# Altium PCB MainBoard_Layout_V1.PcbDoc (part 2 of 2)
Units mm, origin at the board's own origin, x right, y up, seen from the top; angles counter-clockwise.
Board outline 110.87 x 110.11 mm, 4 copper layers (Top Layer, Signal Layer 1, Signal Layer 2, Bottom Layer), stack 0.971 mm thick; 104 components, 160 nets, 547 pads, 193 vias.
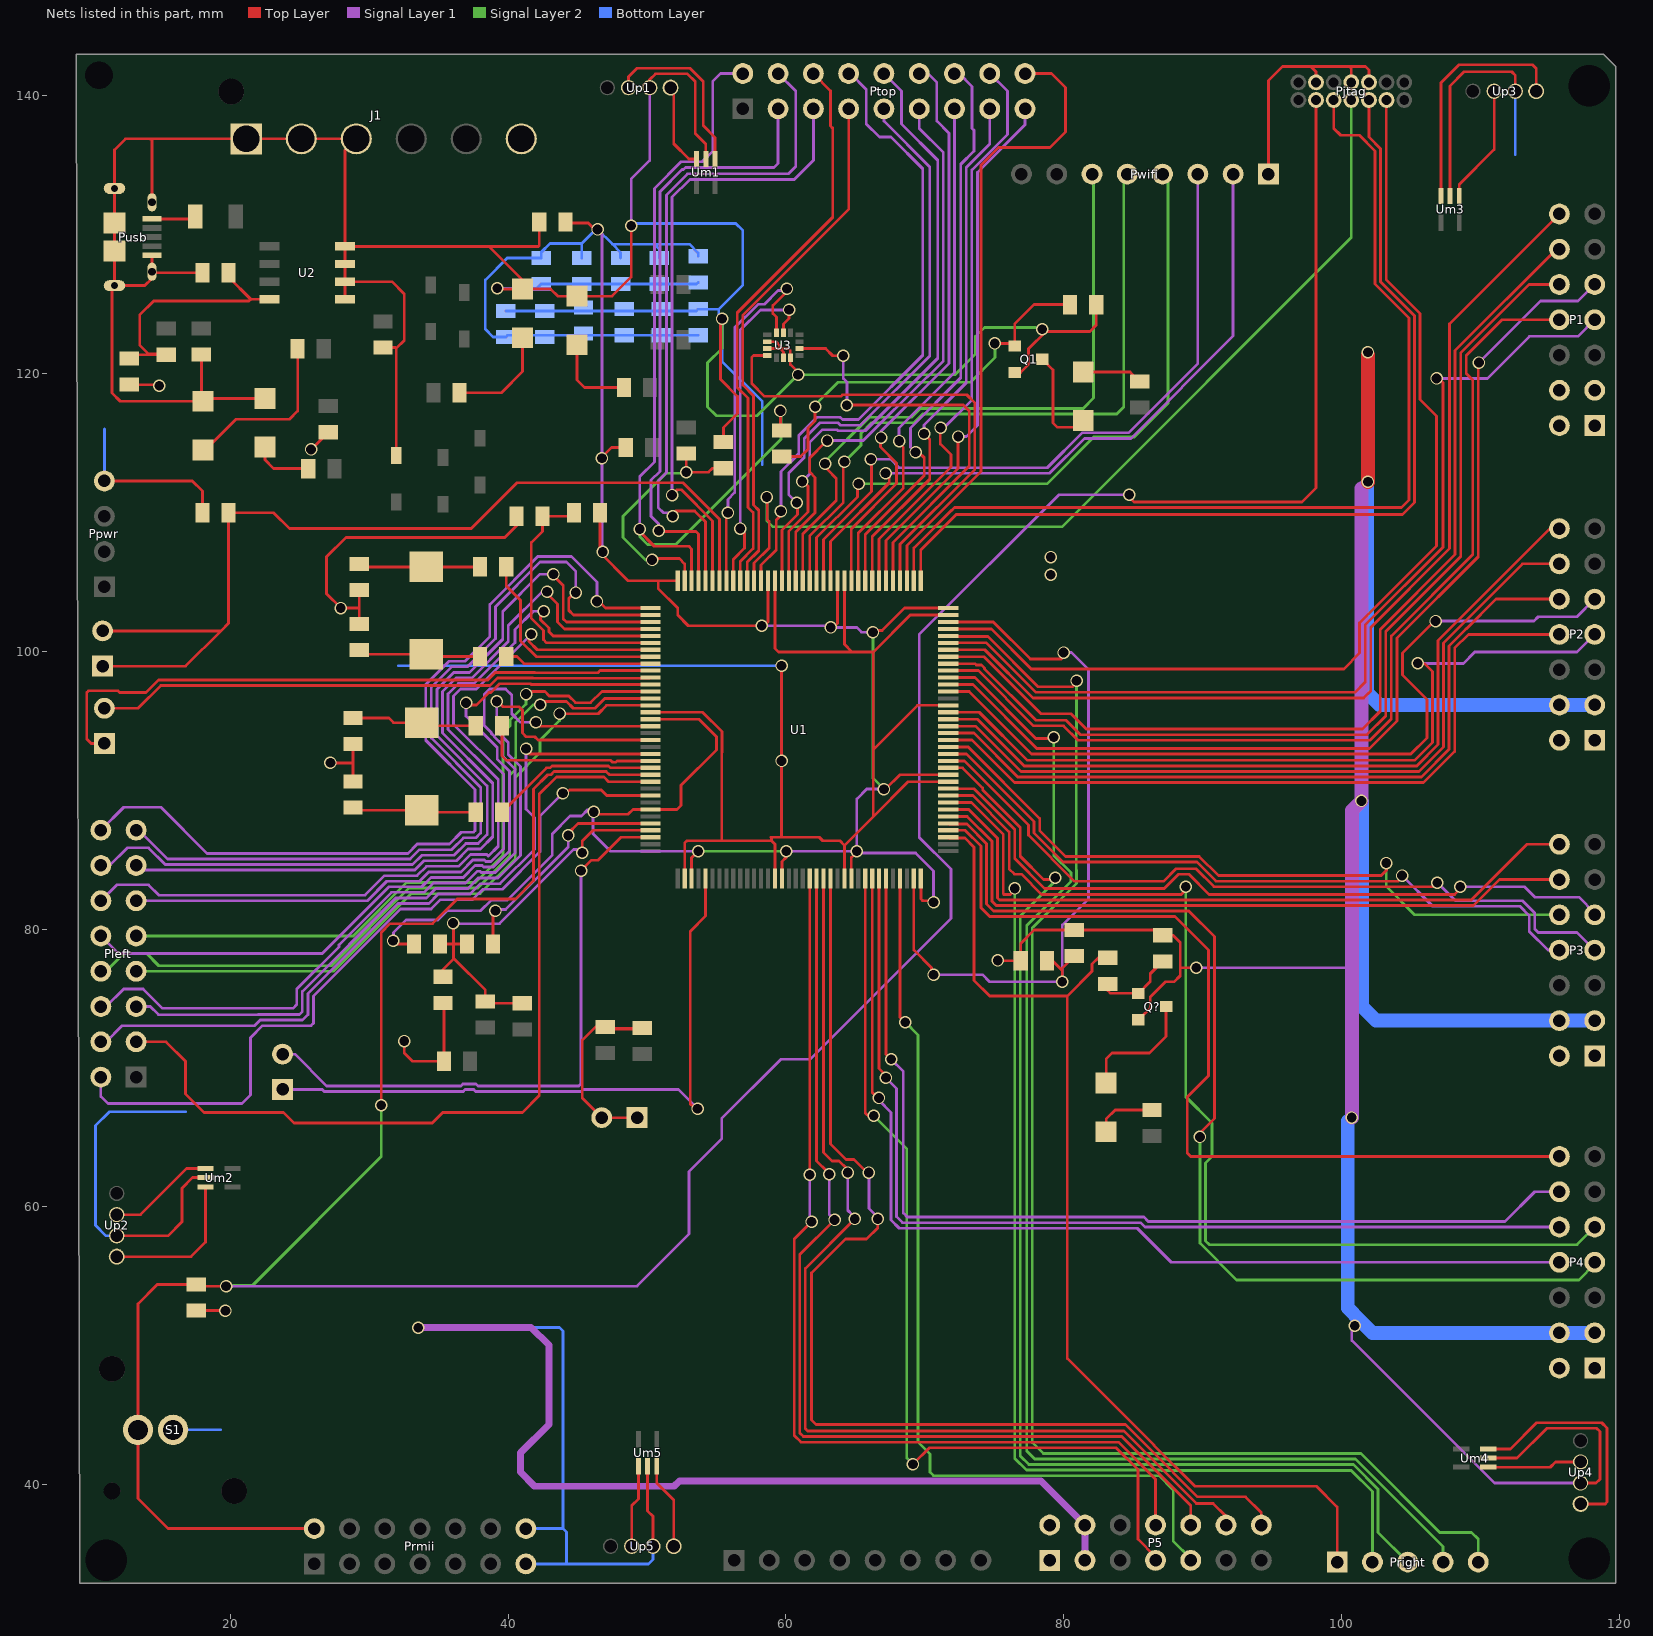
[diagram p4: the nets of this part, all layers, seen from the top]

## Via types
v1: diameter 0.9, hole 0.7, Top Layer to Bottom Layer, 193 vias

## Nets (pads, with @x,y where several pads share a name; then routed paths per layer and width w, separated by ;. In a path a pad name is that pad's centre, name@x,y a point inside that pad or via, vN(x,y) a via of type N, cw(c..) or ccw(c..) an arc to the next point about the centre after c; other vN are vias at no path point) (continued)
GND: 3V3BRD.2 3V3CHRG.2 5VCHRG.2 5VPWR.2 C1.2 C2.2 C3.2 C4.2 C6.1 C7.1 C8.1 C9.1 C10.1 C11.1 C12.1 C13.1 C14.1 C15.1 C16.1 C17.1 C18.1 C19.1 C20.1 C21.1 C26.1 C27.1 C28.2 C29.1 C30.1 D1.A J1.1 J1.2 J1.3 P1.2 P1.9 P2.2 P2.9 P3.2 P3.9 P4.2 P4.9 P5.2 P5.9 pad.1@10.541,141.478 Pjtag.5 Pjtag.7 Pjtag.11 Ppwr.4 Prmii.13 Prmii.14 Pusb.5 Pusb.S1 Pusb.S2 Pusb.S3 Pusb.S4 Pusb.S5 Pusb.S6 Pwifi.1 Q1.2 Q?.2 R11.2 R12.2 R19.1 R20.1 R24.2 R27.2 S1.1 U1.VSS U2.GND U3.2 U3.3 U3.6 U3.7 Um1.2 Um2.2 Um3.2 Um4.2 Um5.2 Up1.GND Up2.GND Up3.GND Up4.GND Up5.GND | length 841.3
  Top Layer w0.2: Ppwr.4@10.922,112.268 17.247,112.268 17.983,111.531 R19.1@17.983,109.982 ; Up2.GND@11.811,57.912 15.494,57.912 16.51,58.928 16.51,61.341 17.272,62.103 Um2.2@18.212,62.103 ; R12.2@12.7,119.202 v1@14.656,119.202 ; Pusb.5@14.351,128.534 Pusb.S2@14.351,127.334 ; Pusb.S1@14.351,132.334 14.351,136.779 14.224,136.906 ; C30.1@17.526,52.527 v1@19.507,52.527 ; C27.1@17.907,121.361 17.907,118.133 17.983,118.209 3V3CHRG.2@22.479,118.209 ; C26.1@17.983,127.254 14.431,127.254 Pusb.S2@14.351,127.334 ; 5VCHRG.2@18.034,118.006 12.067,118.006 11.475,118.597 11.475,126.158 Pusb.S6@11.651,126.334 ; v1@26.035,114.681 26.035,114.757 C29.1@27.051,115.773 ; v1@27.197,91.967 v1(27.202,91.967) 28.829,91.967 ; v1(27.952,103.116) 26.924,104.144 26.924,106.807 28.321,108.204 39.751,108.204 40.589,109.042 C21.1@40.589,109.728 ; v1@28.067,103.124 29.268,103.124 ; U2.GND@28.252,125.349 U2.GND@28.252,126.619 ; C1.2@28.829,90.621 28.829,91.967 ; C2.2@28.829,93.313 28.829,91.967 ; C4.2@29.268,101.967 29.268,103.124 ; C3.2@29.268,104.405 29.268,103.124 ; C28.2@30.988,121.869 31.862,121.869 31.935,121.796 ; D1.A@31.935,114.097 31.935,121.796 ; v1@32.512,71.755 32.512,71.069 33.096,70.485 R11.2@35.382,70.485 35.382,74.61 C7.1@35.306,74.686 ; v1@39.243,126.111 39.271,126.083 3V3BRD.2@41.029,126.083 ; C6.1@42.24,130.914 42.24,129.235 42.164,129.159 38.608,129.159 ; v1(48.857,130.654) 48.857,126.962 47.47,125.575 5VPWR.2@44.958,125.575 43.569,125.575 43.061,126.083 3V3BRD.2@41.029,126.083 ; Um5.2@50.038,41.326 50.038,38.1 50.419,37.719 Up5.GND@50.419,35.56 ; U1.VSS@50.235,95.611 53.995,95.611 55.391,94.215 55.391,92.734 55.372,92.715 55.372,86.36 ; Up1.GND@50.419,140.589 50.165,140.843 50.165,141.156 50.595,141.586 52.902,141.586 53.467,141.021 53.467,137.287 54.229,136.525 Um1.2@54.229,135.458 ; U1.VSS@52.71,83.636 52.71,86.207 52.863,86.36 55.372,86.36 ; v1@55.285,123.749 55.285,119.594 56.515,118.364 56.515,117.12 55.499,116.104 R20.1@55.499,115.062 ; U3.3@58.657,121.797 59.579,121.797 ; U3.2@58.657,122.297 59.263,122.297 59.579,121.981 59.579,121.797 ; U1.VSS@59.21,83.636 59.21,86.111 58.961,86.36 ; U1.VSS@59.21,105.086 59.21,100.194 59.455,99.949 64.77,99.949 ; v1@59.69,99.06 59.69,86.614 ; U3.6@59.817,121.137 59.817,121.559 59.579,121.797 ; v1@60.964,120.015 60.317,120.662 U3.7@60.317,121.137 60.317,121.666 60.186,121.797 59.579,121.797 ; U1.VSS@64.21,83.636 64.21,86.031 ; U1.VSS@64.21,105.086 64.21,100.509 64.77,99.949 ; U1.VSS@71.685,90.611 68.79,90.611 66.294,88.115 ; U1.VSS@71.685,96.111 69.476,96.111 66.294,92.929 ; U1.VSS@71.685,102.611 68.956,102.611 66.294,99.949 ; v1@75.241,77.724 C9.1@76.911,77.724 76.911,78.971 77.874,79.934 C8.1@80.772,79.934 86.741,79.934 R24.2@87.122,79.553 87.884,79.553 88.392,79.045 88.392,77.216 ; Q1.2@76.47,120.081 76.901,120.081 77.47,120.65 77.47,121.785 78.723,123.038 81.89,123.038 82.347,123.495 R27.2@82.347,124.968 ; Q?.2@85.376,73.472 86.233,74.329 86.233,75.118 87.315,76.2 87.95,76.2 88.392,76.642 88.392,77.216 ; v1@89.46,77.216 88.392,77.216 ; Pwifi.1@94.742,134.366 94.742,141.097 95.758,142.113 97.79,142.113 ; Pjtag.11@98.171,140.97 98.171,141.732 97.79,142.113 ; Pjtag.7@100.711,140.97 100.711,141.986 100.584,142.113 ; Pjtag.5@101.981,140.97 101.981,141.859 101.727,142.113 100.584,142.113 ; Um3.2@107.823,132.791 107.823,140.716 108.839,141.732 112.268,141.732 112.522,141.478 Up3.GND@112.522,140.335 ; Um4.2@110.566,41.91 112.649,41.91 114.789,44.05 118.383,44.05 118.618,43.815 118.618,40.386 118.34,40.108 Up4.GND@117.221,40.108 ; Pusb.S6@11.651,126.334 Pusb.S5@11.651,128.834 Pusb.S4@11.651,130.834 Pusb.S3@11.651,133.334 11.651,136.111 12.446,136.906 14.224,136.906 ; Pusb.S6@11.651,126.334 13.83,126.334 14.351,126.855 Pusb.S2@14.351,127.334 ; 14.224,136.906 J1.1@21.14,136.906 J1.2@25.1,136.906 J1.3@29.06,136.906 28.252,136.098 U2.GND@28.252,129.159 ; U2.GND@28.252,126.619 31.626,126.619 32.512,125.733 32.512,122.373 31.935,121.796 ; U2.GND@28.252,126.619 U2.GND@28.252,127.889 U2.GND@28.252,129.159 ; U2.GND@28.252,129.159 38.608,129.159 ; 38.608,129.159 41.029,126.738 3V3BRD.2@41.029,126.083 ; 55.372,86.36 58.961,86.36 ; 58.961,86.36 58.961,86.581 58.928,86.614 59.69,86.614 ; 59.69,86.614 62.397,86.614 62.651,86.36 63.881,86.36 64.21,86.031 ; 64.21,86.031 66.294,88.115 ; 64.77,99.949 66.294,99.949 ; 66.294,88.115 66.294,92.929 ; 66.294,92.929 66.294,99.949 ; 97.79,142.113 100.584,142.113
  Top Layer w1: v1(101.913,112.206) v1@101.913,121.353
  Signal Layer 1 w0.2: v1(48.857,130.654) 48.857,134.015 50.189,135.347 Up1.GND@50.189,140.589 ; v1(89.555,77.21) 100.745,77.21 100.751,77.216 ; v1@100.751,51.435 100.751,50.379 111.022,40.108 Up4.GND@117.221,40.108
  Signal Layer 1 w0.5: v1@33.782,51.308 41.656,51.308 42.926,50.038 42.926,44.323 40.894,42.291 40.894,40.894 41.91,39.878 51.943,39.878 52.324,40.259 78.359,40.259 P5.9@81.534,37.084 P5.2@81.534,34.544
  Signal Layer 1 w0.6: 101.442,111.735 v1(101.913,112.206)
  Signal Layer 1 w1: v1(100.751,66.431) 100.751,77.216 100.751,88.532 v1(101.442,89.223) 101.442,111.735
  Signal Layer 2 w0.2: v1(55.397,123.944) 55.397,121.818 54.356,120.777 54.356,117.602 54.991,116.967 57.927,116.967 v1(60.873,119.914) 72.162,119.914 73.66,121.412 73.66,122.682 74.295,123.317 v1@78.359,123.317
  Bottom Layer w0.2: Ppwr.4@10.922,112.268 10.922,116.006 ; Up2.GND@11.811,57.912 11.049,57.912 10.287,58.674 10.287,65.853 11.28,66.846 16.755,66.846 ; S1.1@15.875,43.942 19.304,43.942 ; 32.102,98.962 v1(59.683,98.962) ; v1@33.299,51.308 43.688,51.308 43.942,51.054 43.942,36.83 ; v1(39.216,126.146) 42.082,126.146 C14.1@42.377,126.441 C13.1@45.298,126.441 C12.1@48.092,126.441 C11.1@50.886,126.441 53.553,126.441 C10.1@53.68,126.568 ; C15.1@39.837,124.511 C16.1@42.631,124.511 53.553,124.511 C20.1@53.68,124.638 55.169,124.638 ; Prmii.13@41.275,34.29 44.196,34.29 ; Prmii.14@41.275,37.211 Prmii.14@41.275,36.83 43.942,36.83 ; v1@49.022,130.81 56.388,130.81 56.896,130.302 56.896,126.365 55.169,124.638 ; Up5.GND@50.419,35.56 50.419,34.603 50.106,34.29 44.196,34.29 ; 58.3,113.451 58.3,117.976 55.397,120.879 v1(55.397,123.944) 55.169,124.172 55.169,124.638 ; v1@100.457,66.167 v1@100.711,66.421 ; v1(100.965,51.435) 101.346,51.816 ; 112.522,135.763 Up3.GND@112.522,140.335 ; 43.942,36.83 44.196,36.576 44.196,34.29
  Bottom Layer w1: v1@100.457,66.167 100.457,52.705 101.346,51.816 102.235,50.927 P4.9@115.697,50.927 P4.2@118.237,50.927 ; v1@101.473,89.154 101.473,74.422 102.489,73.406 P3.9@115.697,73.406 P3.2@118.237,73.406 ; v1@101.854,112.06 101.854,97.028 102.743,96.139 P2.9@115.697,96.139 P2.2@118.237,96.139
  other v1: 33.52,51.289 19.64,52.508 32.526,71.936 75.259,77.739 59.683,92.104 79.068,105.518 79.068,106.788 25.806,114.534 14.884,119.127 101.913,121.528 78.466,123.19
I2C1_SCL: U1.PB6 U3.13 | length 24.5
  Top Layer w0.2: U1.PB6@56.21,105.086 56.21,106.616 57.023,107.429 57.023,108.526 v1(56.71,108.839) ; U3.13@59.817,122.957 59.817,123.571 60.223,123.977 v1(60.223,124.587)
  Signal Layer 1 w0.2: v1(56.71,108.839) 56.71,123.131 58.166,124.587 60.071,124.587 v1@60.198,124.714
I2C1_SDA: U1.PB7 U3.14 | length 26.8
  Top Layer w0.2: U1.PB7@55.71,105.086 55.71,109.731 v1@55.854,109.875 ; U3.14@59.317,122.957 59.317,124.071 59.055,124.333 59.055,124.905 60.071,125.921 v1(60.071,126.111)
  Signal Layer 1 w0.2: v1(55.821,109.982) 55.821,110.939 56.31,111.428 56.31,123.297 58,124.987 58.439,124.987 59.436,125.984 v1@59.918,125.984
I2C2_SCL: Pi2c.2 U1.PF1 | length 40.2
  Top Layer w0.2: Pi2c.2@10.922,95.905 13.355,95.905 14.986,97.536 38.696,97.536 39.23,98.07 41.764,98.07 41.773,98.061 50.185,98.061 U1.PF1@50.235,98.111
I2C2_SDA: Pi2c.1 U1.PF0 | length 46.1
  Top Layer w0.2: Pi2c.1@10.922,93.365 9.981,93.365 9.652,93.694 9.652,97.028 9.779,97.155 11.905,97.155 12.032,97.028 13.912,97.028 14.82,97.936 38.531,97.936 39.065,98.47 41.929,98.47 41.938,98.461 46.467,98.461 46.617,98.611 U1.PF0@50.235,98.611
JTCK-SWCLK: Pjtag.6 U1.PA14 | length 69.5
  Top Layer w0.2: U1.PA14@69.71,105.086 69.71,107.302 72.263,109.855 104.394,109.855 105.264,110.725 105.264,124.167 102.82,126.611 102.82,136.194 101.981,137.033 Pjtag.6@101.981,139.7
JTDI: Pjtag.10 U1.PA15 | length 71.3
  Top Layer w0.2: U1.PA15@69.21,105.086 69.21,107.437 71.94,110.167 71.951,110.167 72.136,110.351 104.325,110.351 104.864,110.891 104.864,124.002 102.42,126.445 102.42,136.028 101.288,137.16 99.949,137.16 99.441,137.668 Pjtag.10@99.441,139.7
JTDO_SWO: Pjtag.8 U1.PB3 | length 68.9
  Top Layer w0.2: U1.PB3@57.71,105.086 57.71,106.351 58.801,107.442 58.801,109.347 58.648,109.5 v1@58.648,110.998
  Signal Layer 2 w0.2: v1(58.628,111.108) 58.628,109.393 59.055,108.966 79.883,108.966 100.711,129.794 Pjtag.8@100.711,139.7
JTMS-SWDIO: Pjtag.4 U1.PA13 | length 74.9
  Top Layer w0.2: U1.PA13@71.685,101.611 74.792,101.611 77.666,98.737 100.174,98.737 101.308,99.871 101.308,102.053 106.853,107.598 106.853,116.953 105.664,118.142 105.664,124.333 103.22,126.777 103.22,139.669 Pjtag.4@103.251,139.7
LCONN1: Pleft.16 U1.PE2 | length 65.1
  Top Layer w0.2: v1@46.609,103.505 47.003,103.111 U1.PE2@50.235,103.111
  Signal Layer 1 w0.2: Pleft.16@10.668,87.122 12.319,88.773 14.986,88.773 18.314,85.445 32.776,85.445 33.45,86.119 35.77,86.119 36.62,86.969 37.502,86.969 37.618,87.086 37.618,90.051 34.068,93.601 34.068,97.602 35.748,99.282 36.884,99.282 38.679,101.077 38.679,103.38 42.125,106.826 44.558,106.826 46.395,104.989 v1(46.395,103.594)
LCONN2: Pleft.15 U1.PE3 | length 63
  Top Layer w0.2: v1@44.685,104.14 44.361,103.816 44.361,102.959 44.709,102.611 U1.PE3@50.235,102.611
  Signal Layer 1 w0.2: Pleft.15@13.208,87.122 13.393,87.122 15.47,85.045 32.941,85.045 33.616,85.719 35.936,85.719 36.785,86.569 37.667,86.569 38.018,86.92 38.018,90.216 34.468,93.767 34.468,97.437 35.913,98.882 37.049,98.882 39.079,100.912 39.079,103.214 42.291,106.426 44.196,106.426 44.871,105.751 v1(44.871,104.229)
LCONN3: Pleft.14 U1.PE4 | length 64.4
  Top Layer w0.2: v1@43.312,105.41 43.961,104.761 43.961,102.343 44.193,102.111 U1.PE4@50.235,102.111
  Signal Layer 1 w0.2: Pleft.14@10.668,84.582 11.303,84.582 12.573,85.852 14.097,85.852 15.304,84.645 33.107,84.645 33.781,85.319 36.101,85.319 36.951,86.169 37.84,86.169 38.488,86.817 38.488,90.312 34.868,93.932 34.868,97.271 36.079,98.482 37.215,98.482 39.605,100.872 39.605,102.87 42.291,105.556 v1(43.256,105.556)
LCONN4: Pleft.13 U1.PE5 | length 59.2
  Top Layer w0.2: v1@42.818,104.14 43.561,103.397 43.561,102.108 44.058,101.611 U1.PE5@50.235,101.611
  Signal Layer 1 w0.2: Pleft.13@13.208,84.582 13.545,84.245 33.273,84.245 33.947,84.919 36.267,84.919 37.117,85.769 38.006,85.769 38.888,86.651 38.888,90.499 35.268,94.119 35.268,97.105 36.245,98.082 37.381,98.082 40.005,100.706 40.005,101.854 42.437,104.286 v1(42.799,104.286)
LCONN5: Pleft.12 U1.PE6 | length 62.4
  Top Layer w0.2: v1@42.334,102.786 42.334,102.278 42.945,101.667 42.945,101.407 43.241,101.111 U1.PE6@50.235,101.111
  Signal Layer 1 w0.2: Pleft.12@10.668,82.042 11.811,83.185 14.097,83.185 14.84,82.442 29.691,82.442 31.094,83.845 33.438,83.845 34.113,84.519 36.433,84.519 37.283,85.369 38.457,85.369 38.557,85.269 38.591,85.269 39.288,85.966 39.288,90.76 35.668,94.38 35.668,96.94 36.41,97.682 37.547,97.682 40.488,100.623 40.488,101.575 41.802,102.889 v1(42.557,102.889)
LCONN6: Pleft.11 U1.PC13 | length 57.4
  Top Layer w0.2: v1@41.501,101.111 41.501,100.705 42.095,100.111 U1.PC13@50.235,100.111
  Signal Layer 1 w0.2: Pleft.11@13.208,82.042 29.857,82.042 31.26,83.445 33.604,83.445 34.278,84.119 36.598,84.119 37.448,84.969 38.291,84.969 38.391,84.869 38.757,84.869 39.688,85.8 39.688,91.122 36.068,94.742 36.068,96.774 36.576,97.282 37.712,97.282 v1(41.668,101.238)
LCONN7: Pleft.10 U1.PF2 | length 58.9
  Top Layer w0.2: v1@37.033,96.139 37.719,96.139 38.608,97.028 38.754,97.028 39.396,97.67 41.598,97.67 41.657,97.611 U1.PF2@50.235,97.611
  Signal Layer 1 w0.2: Pleft.10@10.668,79.502 11.938,78.232 26.612,78.232 31.425,83.045 33.78,83.045 34.454,83.719 36.764,83.719 37.614,84.569 38.125,84.569 38.225,84.469 38.923,84.469 40.088,85.634 40.088,91.369 39.205,92.252 39.205,93.094 36.969,95.33 v1(36.969,96.285)
LCONN8: Pleft.9 U1.PF3 | length 50.8
  Top Layer w0.2: v1@41.275,96.901 41.529,96.901 41.739,97.111 42.641,97.111 42.959,96.793 44.362,96.793 44.851,96.304 45.94,96.304 46.747,97.111 U1.PF3@50.235,97.111
  Signal Layer 2 w0.2: Pleft.9@13.208,79.502 28.841,79.502 32.689,83.35 37.642,83.35 39.624,85.332 39.624,94.126 40.138,94.64 40.138,95.047 41.287,96.196 v1(41.287,96.92)
LCONN9: Pleft.8 U1.PF4 | length 54.3
  Top Layer w0.2: v1@42.24,96.111 42.522,96.393 44.196,96.393 44.685,95.904 46.247,95.904 46.954,96.611 U1.PF4@50.235,96.611
  Signal Layer 2 w0.2: Pleft.8@10.668,76.962 11.049,76.962 12.319,78.232 13.97,78.232 14.84,77.362 27.266,77.362 32.854,82.95 37.807,82.95 40.113,85.256 40.113,91.098 40.513,91.498 40.513,92.329 40.538,92.354 40.538,94.881 41.815,96.158 v1(42.303,96.158)
LCONN10: Pleft.7 U1.PF5 | length 49.2
  Top Layer w0.2: v1@43.688,95.504 46.482,95.504 47.089,96.111 U1.PF5@50.235,96.111
  Signal Layer 2 w0.2: Pleft.7@13.208,76.962 27.432,76.962 33.02,82.55 37.973,82.55 40.513,85.09 40.513,90.932 42.291,92.71 42.291,93.599 43.7,95.008 v1(43.7,95.523)
LCONN11: Pleft.6 U1.PF6 | length 62.5
  Top Layer w0.2: v1@42.152,94.742 42.283,94.611 U1.PF6@50.235,94.611
  Signal Layer 1 w0.2: Pleft.6@10.668,74.422 11.049,74.422 12.319,75.692 13.716,75.692 15.113,74.295 24.511,74.295 24.777,74.561 24.777,75.681 27.813,78.717 27.813,78.867 31.591,82.645 33.946,82.645 34.62,83.319 36.93,83.319 37.78,84.169 37.96,84.169 38.06,84.069 39.088,84.069 40.488,85.469 40.488,91.534 39.605,92.417 39.605,93.26 38.989,93.876 38.989,93.895 38.78,94.104 38.78,94.152 38.277,94.655 38.277,96.901 38.658,97.282 39.82,97.282 40.259,96.843 40.259,95.504 40.875,94.888 v1(41.998,94.888)
LCONN12: Pleft.5 U1.PF8 | length 58.4
  Top Layer w0.2: v1@39.235,96.393 39.616,96.012 40.767,96.012 41.021,95.758 41.021,94.111 41.279,93.853 41.91,93.853 42.152,93.611 U1.PF8@50.235,93.611
  Signal Layer 1 w0.2: Pleft.5@13.208,74.422 14.224,74.422 14.809,73.837 21.975,73.837 21.982,73.844 24.966,73.844 25.177,74.055 25.177,75.515 31.907,82.245 34.111,82.245 34.786,82.919 37.096,82.919 37.846,83.669 39.254,83.669 40.888,85.303 40.888,91.7 40.005,92.583 40.005,93.445 39.18,94.27 v1(39.18,96.393)
LCONN13: Pleft.4 U1.PF10 | length 54.4
  Top Layer w0.2: v1@41.275,92.837 41.501,92.611 U1.PF10@50.235,92.611
  Signal Layer 1 w0.2: Pleft.4@10.668,71.882 11.049,71.882 12.211,73.044 21.748,73.044 22.148,73.444 25.184,73.444 25.577,73.837 25.577,75.35 32.073,81.845 34.289,81.845 34.964,82.519 37.261,82.519 38.011,83.269 39.42,83.269 41.891,85.74 41.891,88.03 41.288,88.633 v1(41.288,92.983)
LCONN14: Pleft.3 U1.PC0 | length 64
  Top Layer w0.2: Pleft.3@13.208,71.882 15.367,71.882 16.764,70.485 16.764,68.136 18.098,66.802 23.829,66.802 24.591,66.04 34.528,66.04 35.29,66.802 41.021,66.802 42.24,68.021 42.24,89.714 43.478,90.951 46.89,90.951 47.23,90.611 U1.PC0@50.235,90.611
LCONN15: Pleft.2 U1.PC2 | length 55.5
  Top Layer w0.2: v1@44.196,89.789 44.418,90.011 46.698,90.011 47.099,89.611 U1.PC2@50.235,89.611
  Signal Layer 1 w0.2: Pleft.2@10.668,69.342 10.668,67.945 11.176,67.437 20.828,67.437 21.444,68.053 21.444,72.175 22.313,73.044 25.8,73.044 25.977,73.221 25.977,75.184 32.238,81.445 34.455,81.445 35.129,82.119 37.427,82.119 38.177,82.869 39.586,82.869 42.291,85.575 42.291,88.138 v1(43.942,89.789)
MCU_VDD: C6.2 C10.2 C11.2 C12.2 C13.2 C14.2 C15.2 C16.2 C17.2 C18.2 C19.2 C20.2 R5.2 R9.2 R10.1 U1.VDD | length 207
  Top Layer w0.2: v1(31.713,79.16) 31.945,78.928 R5.2@33.223,78.928 ; C6.2@44.12,130.914 44.2,130.834 45.763,130.834 v1@46.228,130.369 ; v1@46.168,88.265 48.641,88.265 48.987,88.611 U1.VDD@50.235,88.611 52.162,88.611 52.451,88.9 52.451,90.36 54.991,92.9 54.991,93.853 53.733,95.111 U1.VDD@50.235,95.111 ; R9.2@46.609,109.982 46.609,107.105 48.628,105.086 50.8,105.086 ; v1@46.609,113.843 47.447,114.681 R10.1@48.463,114.681 ; U1.VDD@52.21,105.086 50.8,105.086 ; U1.VDD@53.21,83.636 53.21,85.134 v1(53.684,85.608) ; v1(58.266,101.845) 52.968,101.845 52.21,102.603 52.21,103.111 50.8,104.521 50.8,105.086 ; v1@58.547,101.967 58.71,102.13 U1.VDD@58.71,105.086 ; U1.VDD@59.71,83.636 59.71,84.856 60.024,85.17 v1(60.024,85.608) ; v1@63.373,101.667 63.71,102.004 U1.VDD@63.71,105.086 ; U1.VDD@64.71,83.636 64.71,85.157 v1@65.024,85.471 ; v1@66.314,101.501 66.929,101.501 68.539,103.111 U1.VDD@71.685,103.111 ; v1@67.21,90.111 68.21,91.111 U1.VDD@71.685,91.111 ; U1.VDD@69.71,83.636 69.723,83.623 69.723,82.169 69.85,82.042 v1@70.485,82.042
  Signal Layer 1 w0.2: v1@31.75,79.375 31.75,79.756 32.639,80.645 34.925,80.645 35.599,81.319 38.018,81.319 38.768,82.069 39.917,82.069 43.18,85.332 43.18,86.868 44.45,88.138 45.275,88.138 45.726,88.589 46.101,88.214 46.101,86.868 47.361,85.608 v1(53.684,85.608) ; v1(46.435,130.38) 46.751,130.065 v1(46.751,113.899) v1@46.751,107.173 ; v1(58.266,101.845) 63.092,101.845 v1(63.219,101.718) 65.113,101.718 65.451,101.38 v1(66.267,101.38) ; v1@60.208,85.608 v1(65.104,85.608) 65.104,89.361 65.82,90.077 v1(67.056,90.077) ; v1@65.104,85.471 69.342,85.471 70.632,84.181 v1(70.632,81.925)
  Signal Layer 2 w0.2: v1@53.858,85.608 v1(60.024,85.608) ; v1(66.267,101.38) 66.267,90.866 v1(67.056,90.077)
  Bottom Layer w0.2: C13.2@45.298,128.321 45.298,129.372 ; C12.2@48.092,128.321 48.092,128.724 47.498,129.318 ; C11.2@50.886,128.321 50.886,128.946 50.514,129.318 ; C20.2@53.68,122.758 C19.2@51.013,122.758 C18.2@48.346,122.758 39.964,122.758 C15.2@39.837,122.631 38.913,122.631 38.354,123.19 38.354,126.746 39.929,128.321 C14.2@42.377,128.321 42.377,128.737 43.012,129.372 45.298,129.372 ; C10.2@53.68,128.448 53.68,128.692 53.054,129.318 50.514,129.318 ; 45.298,129.372 46.306,130.38 v1(46.435,130.38) 47.498,129.318 ; 47.498,129.318 50.514,129.318
  other v1: 46.168,88.431 46.804,107.156
NetC26_2: C26.2 R12.1 R13.2 U2.ADJ | length 19.5
  Top Layer w0.2: R12.1@12.7,121.082 12.975,121.357 R13.2@15.367,121.357 15.312,121.412 14.097,121.412 13.462,122.047 13.462,124.206 14.478,125.222 21.336,125.222 21.463,125.349 ; C26.2@19.863,127.254 19.863,126.949 21.463,125.349 ; U2.ADJ@22.802,125.349 21.463,125.349
NetDled3v3BRD_1: 3V3BRD.1 R28.1 | length 7.6
  Top Layer w0.2: R28.1@36.5,118.618 39.505,118.618 41.029,120.142 3V3BRD.1@41.029,122.583
NetDled3V3CHRG_1: 3V3CHRG.1 R18.1 | length 4.3
  Top Layer w0.2: 3V3CHRG.1@22.479,114.709 22.479,113.792 23.114,113.157 R18.1@25.603,113.157
NetDled5VCHRG_1: 5VCHRG.1 R16.1 | length 12.5
  Top Layer w0.2: 5VCHRG.1@18.034,114.506 18.189,114.506 20.396,116.713 24.257,116.713 24.841,117.297 R16.1@24.841,121.793
NetDled5VPWR_1: 5VPWR.1 R17.1 | length 6.1
  Top Layer w0.2: 5VPWR.1@44.958,122.075 44.958,119.546 45.505,118.999 R17.1@48.336,118.999
NetDusr2_1: Dusr2.1 Q1.3 | length 7.4
  Top Layer w0.2: Q1.3@78.47,121.031 79.232,120.269 79.232,116.443 79.546,116.129 80.922,116.129 Dusr2.1@81.407,116.614
NetDusr2_2: Dusr2.2 R22.2 | length 4.3
  Top Layer w0.2: Dusr2.2@81.407,120.114 84.788,120.114 R22.2@85.471,119.431
NetDusr3_1: Dusr3.1 Q?.3 | length 8.9
  Top Layer w0.2: Dusr3.1@83.058,68.905 83.058,70.639 83.489,71.069 86.172,71.069 87.376,72.273 Q?.3@87.376,74.422
NetDusr3_2: Dusr3.2 R25.2 | length 4.5
  Top Layer w0.2: Dusr3.2@83.058,65.405 83.058,66.32 83.717,66.98 R25.2@86.36,66.98
NetF1_1: F1.1 Pusb.1 | length 3.2
  Top Layer w0.2: Pusb.1@14.351,131.134 17.279,131.134 F1.1@17.463,131.318
NetPboot_1: Pboot.1 Pboot.2 R19.2 U1.BOOT0 | length 69.5
  Top Layer w0.2: Pboot.1@10.795,98.933 16.773,98.933 19.313,101.473 ; Pboot.2@10.795,101.473 19.313,101.473 ; U1.BOOT0@55.21,105.086 55.21,109.509 52.578,112.141 40.64,112.141 37.338,108.839 24.257,108.839 23.114,109.982 R19.2@19.863,109.982 19.863,102.023 19.313,101.473
NetQ1_1: Q1.1 R26.1 R27.1 | length 28.3
  Top Layer w0.2: R26.1@59.69,114.021 61.062,114.021 61.595,114.554 61.595,116.078 62.103,116.586 v1@62.103,117.475 ; v1(75.037,122.174) 76.277,122.174 Q1.1@76.47,121.981 76.47,123.579 77.859,124.968 R27.1@80.467,124.968
  Signal Layer 2 w0.2: v1(62.103,117.602) 62.103,117.729 63.754,119.38 73.279,119.38 75.057,121.158 v1@75.057,122.047
NetQ?_1: Q?.1 R23.1 R24.1 | length 5.8
  Top Layer w0.2: R23.1@83.185,76.058 83.185,75.565 83.378,75.372 Q?.1@85.376,75.372 86.233,76.229 86.233,76.784 R24.1@87.122,77.673
NetR20_2: R20.2 R21.2 U1.PDR_ON | length 18
  Top Layer w0.2: v1@50.356,106.68 52.324,106.68 52.71,106.294 U1.PDR_ON@52.71,105.086 ; R21.2@52.819,114.249 v1(52.819,112.903) 54.437,112.903 54.717,113.182 R20.2@55.499,113.182
  Signal Layer 2 w0.2: v1(50.36,106.583) 49.881,106.583 48.26,108.204 48.26,109.728 51.354,112.822 v1@52.832,112.822
NetUm1_1: Um1.1 Up1.VIN2 | length 12.8
  Top Layer w0.2: Up1.VIN2@48.895,140.589 48.665,140.819 48.665,141.375 49.276,141.986 53.086,141.986 54.045,141.027 54.045,137.852 54.889,137.008 Um1.1@54.889,135.458
NetUm1_3: Um1.3 Up1.VIN1 | length 6.1
  Top Layer w0.2: Up1.VIN1@51.919,140.589 51.919,136.549 53.01,135.458 Um1.3@53.569,135.458
NetUm2_1: Um2.1 Up2.VIN2 | length 7.8
  Top Layer w0.2: Up2.VIN2@11.811,59.436 13.516,59.436 16.843,62.763 Um2.1@18.212,62.763
NetUm2_3: Um2.3 Up2.VIN1 | length 10.8
  Top Layer w0.2: Up2.VIN1@11.811,56.412 17.169,56.412 18.212,57.455 Um2.3@18.212,61.443
NetUm3_1: Um3.1 Up3.VIN2 | length 8.6
  Top Layer w0.2: Um3.1@108.483,132.791 108.483,133.629 110.998,136.144 Up3.VIN2@110.998,140.335
NetUm3_3: Um3.3 Up3.VIN1 | length 17.3
  Top Layer w0.2: Um3.3@107.163,132.791 107.163,140.945 108.458,142.24 113.768,142.24 114.022,141.986 Up3.VIN1@114.022,140.335
NetUm4_1: Um4.1 Up4.VIN2 | length 6.8
  Top Layer w0.2: Um4.1@110.566,41.25 115.037,41.25 115.419,41.632 Up4.VIN2@117.221,41.632
NetUm4_3: Um4.3 Up4.VIN1 | length 16.8
  Top Layer w0.2: Um4.3@110.566,42.57 112.166,42.57 114.046,44.45 118.745,44.45 119.126,44.069 119.126,38.735 118.999,38.608 Up4.VIN1@117.221,38.608
NetUm5_1: Um5.1 Up5.VIN2 | length 6
  Top Layer w0.2: Up5.VIN2@48.895,35.56 48.895,38.481 49.378,38.964 Um5.1@49.378,41.326
NetUm5_3: Um5.3 Up5.VIN1 | length 6.3
  Top Layer w0.2: Um5.3@50.698,41.326 50.698,40.107 51.919,38.886 Up5.VIN1@51.919,35.56
NRST: C30.2 Pjtag.12 Prmii.2 S1.2 U1.NRST | length 243
  Top Layer w0.2: v1(19.685,54.286) 17.647,54.286 C30.2@17.526,54.407 14.729,54.407 13.335,53.013 S1.2@13.335,43.942 13.335,38.989 15.494,36.83 Prmii.2@26.035,36.83 ; v1(30.861,67.31) 30.861,79.756 31.496,80.391 34.555,80.391 36.333,82.169 40.513,82.169 41.829,83.485 41.829,90.089 42.851,91.111 43.072,91.111 43.312,91.351 47.056,91.351 47.296,91.111 U1.NRST@50.235,91.111 ; v1@84.836,110.985 85.07,110.751 97.162,110.751 98.171,111.76 Pjtag.12@98.171,139.7
  Signal Layer 1 w0.2: v1(19.685,54.286) 49.275,54.286 53.023,58.033 53.023,62.547 55.372,64.897 55.372,66.366 59.628,70.622 61.732,70.622 71.882,80.772 71.882,84.328 69.596,86.614 69.596,101.219 79.648,111.271 v1(84.722,111.271)
  Signal Layer 2 w0.2: v1@19.685,54.356 21.605,54.356 30.861,63.612 v1(30.861,67.31)
OSC32_IN: C3.1 R3.1 XTAL2.2 | length 8.8
  Top Layer w0.2: C3.1@29.268,106.285 29.471,106.082 XTAL2.2@34.094,106.082 R3.1@37.98,106.082
OSC32_OUT: C4.1 R4.1 XTAL2.1 | length 8.9
  Top Layer w0.2: C4.1@29.268,100.087 29.573,99.782 XTAL2.1@34.094,99.782 34.246,99.63 R4.1@37.98,99.63
OSC_IN: C2.1 R1.1 XTAL1.2 | length 9.1
  Top Layer w0.2: C2.1@28.829,95.193 31.414,95.193 31.744,94.863 XTAL1.2@33.782,94.863 34.011,94.634 R1.1@37.668,94.634
OSC_OUT: C1.1 R2.1 XTAL1.1 | length 9
  Top Layer w0.2: C1.1@28.829,88.741 29.007,88.563 XTAL1.1@33.782,88.563 33.934,88.411 R2.1@37.668,88.411
PA8_GPIO: P1.12 U1.PA8 | length 71.8
  Top Layer w0.2: U1.PA8@71.685,99.111 73.609,99.111 73.709,99.011 74.09,99.011 74.295,98.806 74.295,98.737 77.998,95.034 80.161,95.034 81.196,93.999 101.853,93.999 103.194,95.34 103.194,101.416 108.585,106.807 108.585,121.488 113.513,126.416 P1.12@115.697,126.416
PA9_GPIO: P1.13 U1.PA9 | length 72.5
  Top Layer w0.2: U1.PA9@71.685,99.611 74.252,99.611 78.359,95.504 80.518,95.504 81.623,94.399 101.511,94.399 102.794,95.682 102.794,101.582 108.185,106.973 108.185,121.654 115.487,128.956 P1.13@115.697,128.956
PA10_GPIO: P1.14 U1.PA10 | length 72
  Top Layer w0.2: U1.PA10@71.685,100.111 74.318,100.111 77.782,96.647 101.6,96.647 102.108,97.155 102.108,101.722 107.785,107.399 107.785,123.584 P1.14@115.697,131.496
PA11_GPIO: P1.4 U1.PA11 | length 69.1
  Top Layer w0.2: U1.PA11@71.685,100.611 74.43,100.611 77.994,97.047 100.984,97.047 101.708,97.771 101.708,101.888 107.315,107.495 107.315,119.355 v1@107.163,119.507
  Signal Layer 1 w0.2: v1(106.853,119.649) 110.505,119.649 113.538,122.682 117.043,122.682 P1.4@118.237,123.876
PB14: Pright.1 R23.2 U1.PB14 | length 77.2
  Top Layer w0.2: U1.PB14@71.685,86.611 71.735,86.561 72.882,86.561 73.552,85.891 73.552,76.308 74.676,75.184 80.264,75.184 ; R23.2@83.185,77.938 82.494,77.938 82.042,77.486 82.042,76.962 80.264,75.184 ; Pright.1@99.695,34.417 99.695,38.393 98.21,39.878 89.454,39.878 86.506,42.826 86.506,42.838 80.264,49.08 80.264,75.184
PB15_GPIO: P4.14 U1.PB15 | length 67.1
  Top Layer w0.2: U1.PB15@71.685,87.111 72.909,87.111 74.041,85.979 74.041,81.534 74.676,80.899 88.011,80.899 90.424,78.486 90.424,69.437 88.9,67.913 88.9,63.881 89.154,63.627 P4.14@115.697,63.627
PC9_GPIO: P1.11 U1.PC9 | length 71.2
  Top Layer w0.2: U1.PC9@71.685,98.611 73.855,98.611 77.832,94.634 79.995,94.634 81.03,93.599 102.05,93.599 103.594,95.143 103.594,101.112 109.455,106.973 109.455,119.526 108.985,119.996 108.985,121.304 111.557,123.876 P1.11@115.697,123.876
PC11_GPIO: U1.PC11 U3.4 | length 34.8
  Top Layer w0.2: U3.4@58.657,121.297 57.67,121.297 57.531,121.158 57.531,119.304 58.471,118.364 63.963,118.364 64.078,118.479 73.017,118.479 73.601,117.895 73.601,113.098 68.21,107.707 U1.PC11@68.21,105.086
PC12_GPIO: U1.PC12 U3.9 | length 30.5
  Top Layer w0.2: U3.9@60.977,121.797 62.861,121.797 63.373,121.285 v1(64.135,121.285) ; v1(64.389,117.729) 72.771,117.729 73.201,117.299 73.201,113.333 67.71,107.842 U1.PC12@67.71,105.086
  Signal Layer 1 w0.2: v1(64.135,121.285) 64.135,119.634 64.389,119.38 v1(64.389,117.729)
PC14-OSC32_IN: R3.2 U1.PC14 | length 15.6
  Top Layer w0.2: R3.2@39.86,106.082 39.86,104.712 40.894,103.678 40.894,100.746 42.029,99.611 U1.PC14@50.235,99.611
PC15-OSC32_OUT: R4.2 U1.PC15 | length 10.8
  Top Layer w0.2: R4.2@39.998,99.492 R4.2@39.86,99.63 40.629,99.63 41.148,99.111 U1.PC15@50.235,99.111
PD8_GPIO: P4.4 U1.PD8 | length 77.6
  Top Layer w0.2: U1.PD8@71.685,87.611 71.735,87.561 73.025,87.561 74.441,86.145 74.441,81.808 74.95,81.299 89.008,81.299 90.851,79.456 90.851,66.359 v1@89.662,65.17
  Signal Layer 2 w0.2: v1(89.809,65.034) 89.809,57.384 92.456,54.737 117.094,54.737 118.237,55.88 P4.4@118.237,56.007
PD9_GPIO: P3.13 U1.PD9 | length 50
  Top Layer w0.2: U1.PD9@71.685,88.111 73.052,88.111 74.841,86.322 74.841,82.004 75.146,81.699 109.512,81.699 111.379,83.566 P3.13@115.697,83.566
PD10_GPIO: P3.14 U1.PD10 | length 50.9
  Top Layer w0.2: U1.PD10@71.685,88.611 73.168,88.611 75.241,86.538 75.241,82.239 75.381,82.099 109.346,82.099 113.353,86.106 P3.14@115.697,86.106
PD15_GPIO: P3.4 U1.PD15 | length 54.1
  Top Layer w0.2: U1.PD15@71.685,92.111 72.862,92.111 77.47,87.503 77.47,86.761 80.792,83.439 87.184,83.439 88.092,84.347 89.516,84.347 90.811,83.052 v1@106.807,83.052
  Signal Layer 1 w0.2: v1(106.903,83.344) 108.205,82.042 113.03,82.042 113.919,81.153 113.919,80.01 114.173,79.756 116.967,79.756 P3.4@118.237,78.486
PE1: Ptop.2 R26.2 U1.PE1 | length 61.7
  Top Layer w0.2: v1@49.435,108.655 50.521,107.569 53.02,107.569 53.21,107.379 U1.PE1@53.21,105.086 ; v1(59.603,117.31) 59.603,115.987 R26.2@59.69,115.9
  Signal Layer 1 w0.2: v1(49.471,108.807) 49.471,112.578 50.527,113.634 50.527,133.331 52.451,135.255 53.975,135.255 54.737,136.017 54.737,141.057 55.285,141.605 Ptop.2@56.896,141.605
  Signal Layer 2 w0.2: v1(49.471,108.807) 49.471,108.263 50.038,107.696 52.07,107.696 59.644,115.27 v1@59.644,117.094
PE7_GPIO: P5.13 U1.PE7 | length 75.4
  Top Layer w0.2: U1.PE7@62.71,83.636 62.71,63.909 63.314,63.305 63.822,63.305 v1@64.389,62.738 ; v1(64.957,59.125) 61.398,55.566 61.398,44.02 61.565,43.853 84.348,43.853 89.554,38.647 90.766,38.647 91.694,37.719 P5.13@91.694,37.084
  Signal Layer 1 w0.2: v1(64.449,62.469) 64.449,59.757 64.77,59.436 v1@64.77,59.182
PE8_GPIO: P5.14 U1.PE8 | length 79.2
  Top Layer w0.2: U1.PE8@63.21,83.636 63.21,64.524 64.327,63.407 64.888,63.407 v1@65.684,62.611 ; v1(66.608,59.125) 66.608,58.48 65.805,57.677 64.281,57.677 61.849,55.245 61.849,44.643 62.169,44.323 84.455,44.323 86.106,42.672 86.106,42.66 89.65,39.116 93.091,39.116 94.234,37.973 P5.14@94.234,37.084
  Signal Layer 1 w0.2: v1(65.973,62.469) 65.973,59.884 v1@66.548,59.309
PE11_GPIO: P5.4 U1.PE11 | length 68
  Top Layer w0.2: U1.PE11@65.71,83.636 65.71,66.751 66.04,66.421 v1@66.287,66.421 ; v1(69.148,41.472) 70.329,42.653 83.781,42.653 85.344,41.09 85.344,36.068 86.614,34.798 P5.4@86.614,34.544
  Signal Layer 2 w0.2: v1(66.314,66.567) 68.707,64.174 68.707,41.91 v1@68.961,41.656
PE12_GPIO: P4.11 U1.PE12 | length 74.5
  Top Layer w0.2: U1.PE12@66.21,83.636 66.21,68.25 v1@66.608,67.852
  Signal Layer 1 w0.2: v1(66.695,67.837) 66.695,67.671 67.564,66.802 67.564,59.055 68.161,58.458 85.294,58.458 87.745,56.007 P4.11@115.697,56.007
PE13_GPIO: P4.12 U1.PE13 | length 72.7
  Top Layer w0.2: U1.PE13@66.71,83.636 66.71,69.969 v1@67.21,69.469
  Signal Layer 1 w0.2: v1(67.203,69.286) 67.964,68.525 67.964,59.29 68.396,58.858 85.541,58.858 85.852,58.547 P4.12@115.697,58.547
PE14_GPIO: P4.13 U1.PE14 | length 73
  Top Layer w0.2: U1.PE14@67.21,83.636 67.21,70.966 v1@67.564,70.612
  Signal Layer 1 w0.2: v1(67.584,70.622) 68.453,69.753 68.453,59.544 68.739,59.258 85.776,59.258 86.087,58.947 111.779,58.947 113.919,61.087 P4.13@115.697,61.087
PG0_GPIO: P5.11 U1.PG0 | length 71.1
  Top Layer w0.2: v1@61.71,62.484 U1.PG0@61.71,83.636 ; v1(61.849,58.928) 60.598,57.677 60.598,43.542 61.087,43.053 83.947,43.053 86.614,40.386 P5.11@86.614,37.084
  Signal Layer 1 w0.2: v1@61.722,58.928 v1(61.722,62.303)
PG1_GPIO: P5.12 U1.PG1 | length 72.8
  Top Layer w0.2: U1.PG1@62.21,83.636 62.21,63.305 v1@62.992,62.523 ; v1(63.5,59.055) 60.998,56.553 60.998,43.708 61.253,43.453 84.182,43.453 89.154,38.481 P5.12@89.154,37.084
  Signal Layer 1 w0.2: v1(63.119,62.342) 63.119,59.436 v1@63.373,59.182
PG2_GPIO: P3.11 U1.PG2 | length 51.2
  Top Layer w0.2: U1.PG2@71.685,92.611 72.997,92.611 77.87,87.738 77.87,86.927 79.961,84.836 89.593,84.836 90.977,83.452 104.083,83.452 v1@104.267,83.636
  Signal Layer 1 w0.2: v1(104.363,83.852) 106.573,81.642 112.864,81.642 113.519,80.987 113.519,79.844 114.877,78.486 P3.11@115.697,78.486
PG3_GPIO: P3.12 U1.PG3 | length 51.5
  Top Layer w0.2: U1.PG3@71.685,93.111 73.132,93.111 78.27,87.973 78.27,87.092 80.126,85.236 89.758,85.236 91.142,83.852 102.87,83.852 103.251,84.233 v1@103.251,84.709
  Signal Layer 2 w0.2: v1(103.22,84.754) 103.22,83.089 105.283,81.026 P3.12@115.697,81.026
PG4_GPIO: P2.11 U1.PG4 | length 54.1
  Top Layer w0.2: U1.PG4@71.685,93.611 73.394,93.611 76.454,90.551 105.918,90.551 108.153,92.786 108.153,100.228 109.144,101.219 P2.11@115.697,101.219
PG5_GPIO: P2.12 U1.PG5 | length 55
  Top Layer w0.2: U1.PG5@71.685,94.111 73.529,94.111 76.689,90.951 105.752,90.951 107.753,92.952 107.753,100.394 108.978,101.619 108.985,101.619 111.125,103.759 P2.12@115.697,103.759
PG6_GPIO: P2.13 U1.PG6 | length 55.9
  Top Layer w0.2: U1.PG6@71.685,94.611 73.664,94.611 76.924,91.351 105.587,91.351 107.353,93.117 107.353,100.603 113.049,106.299 P2.13@115.697,106.299
PG7_GPIO: P2.14 U1.PG7 | length 56.9
  Top Layer w0.2: U1.PG7@71.685,95.111 73.799,95.111 77.159,91.751 105.421,91.751 106.953,93.283 106.953,100.769 115.023,108.839 P2.14@115.697,108.839
PG8_GPIO: P2.4 U1.PG8 | length 56.9
  Top Layer w0.2: U1.PG8@71.685,95.611 73.922,95.611 77.382,92.151 105.255,92.151 106.553,93.449 106.553,98.552 105.994,99.111 v1@105.421,99.111
  Signal Layer 1 w0.2: v1(105.506,99.132) 108.784,99.132 109.601,99.949 116.967,99.949 P2.4@118.237,101.219
PH0-OSC_IN: R1.2 U1.PH0 | length 13.1
  Top Layer w0.2: R1.2@39.548,94.634 39.548,92.468 39.865,92.151 47.387,92.151 47.527,92.011 47.739,92.011 47.839,92.111 U1.PH0@50.235,92.111
PH1-OSC_OUT: R2.2 U1.PH1 | length 12.1
  Top Layer w0.2: R2.2@39.548,88.411 42.748,91.611 43.006,91.611 43.146,91.751 47.221,91.751 47.361,91.611 U1.PH1@50.235,91.611
RCONN2: Pright.2 U1.PD11 | length 82.8
  Top Layer w0.2: U1.PD11@71.685,89.111 73.366,89.111 75.641,86.836 75.641,82.55 75.692,82.499 76.149,82.499 v1@76.327,82.677
  Signal Layer 2 w0.2: v1(76.474,82.925) 76.474,41.89 77.324,41.04 87.034,41.04 87.053,41.021 100.711,41.021 102.235,39.497 Pright.2@102.235,34.417
RCONN3: Pright.3 U1.PD14 | length 87.6
  Top Layer w0.2: U1.PD14@71.685,91.611 72.717,91.611 74.168,90.16 74.168,90.031 76.874,87.325 76.874,85.243 78.551,83.566 v1@79.121,83.566
  Signal Layer 2 w0.2: v1(79.395,83.687) 79.395,83.459 76.874,80.938 76.874,42.056 77.49,41.44 100.858,41.44 102.635,39.663 102.635,36.557 Pright.3@104.775,34.417
RCONN4: Pright.4 U1.PC8 | length 96.4
  Top Layer w0.2: U1.PC8@71.685,98.111 73.601,98.111 77.986,93.726 v1@79.121,93.726
  Signal Layer 2 w0.2: v1(79.279,93.814) 79.279,85.313 80.518,84.074 80.518,83.439 77.343,80.264 77.343,42.418 77.921,41.84 101.023,41.84 107.315,35.548 Pright.4@107.315,34.417
RCONN5: Pright.5 U1.PA12 | length 103.5
  Top Layer w0.2: U1.PA12@71.685,101.111 71.735,101.061 74.546,101.061 78.16,97.447 80.628,97.447 v1@80.792,97.611
  Signal Layer 2 w0.2: v1(80.93,97.878) 80.93,94.265 80.899,94.234 80.899,84.259 80.918,84.24 80.918,83.273 77.743,80.098 77.743,43.034 78.537,42.24 101.397,42.24 107.08,36.557 109.366,36.557 109.855,36.068 Pright.5@109.855,34.417
SPI1_MISO: Pwifi.4 U1.PG9 | length 49.4
  Top Layer w0.2: U1.PG9@62.21,105.086 62.21,108.184 65.151,111.125 v1@65.151,111.887
  Signal Layer 2 w0.2: v1(65.232,112.06) 78.786,112.06 82.169,115.443 85.09,115.443 87.503,117.856 87.503,133.985 Pwifi.4@87.122,134.366
SPI1_MOSI: Pwifi.3 U1.PD7 | length 50.5
  Top Layer w0.2: U1.PD7@62.71,105.086 62.71,108.049 66.167,111.506 v1@66.167,113.571
  Signal Layer 1 w0.2: v1(66.121,113.838) 67.518,113.838 68.134,113.222 78.817,113.222 81.33,115.735 84.67,115.735 89.662,120.727 Pwifi.3@89.662,134.366
SPI1_NSS: Pwifi.5 U1.PG10 | length 48.5
  Top Layer w0.2: U1.PG10@61.71,105.086 61.71,108.306 64.135,110.731 v1@64.135,113.463
  Signal Layer 2 w0.2: v1(64.216,113.653) 65.405,114.842 65.405,115.697 66.167,116.459 69.215,116.459 69.85,117.094 83.82,117.094 84.328,117.602 84.328,134.112 Pwifi.5@84.582,134.366
SPI1_SCLK: Pwifi.6 U1.PG11 | length 47.2
  Top Layer w0.2: U1.PG11@61.21,105.086 61.21,108.441 63.627,110.858 63.627,112.453 62.992,113.088 v1@62.992,113.411
  Signal Layer 2 w0.2: v1(62.819,113.501) 62.819,113.676 66.001,116.859 69.049,116.859 69.684,117.494 81.407,117.494 82.15,118.237 82.15,134.258 Pwifi.6@82.042,134.366
TCONN1: Ptop.18 U1.PC10 | length 45.7
  Top Layer w0.2: U1.PC10@68.71,105.086 68.71,107.63 74.041,112.961 74.041,135.001 75.311,136.271 79.014,136.271 80.137,137.394 80.137,140.589 79.121,141.605 Ptop.18@77.216,141.605
TCONN2: Ptop.17 U1.PD0 | length 38.3
  Top Layer w0.2: U1.PD0@67.21,105.086 67.21,107.99 72.39,113.17 v1@72.39,115.341
  Signal Layer 1 w0.2: v1(72.403,115.462) 72.993,115.462 73.787,116.256 73.787,134.493 77.216,137.922 Ptop.17@77.216,139.065
TCONN3: Ptop.16 U1.PD1 | length 41.5
  Top Layer w0.2: U1.PD1@66.71,105.086 66.71,108.092 71.882,113.264 71.882,114.173 71.12,114.935 v1@71.12,115.9
  Signal Layer 1 w0.2: v1(71.133,116.097) 71.393,116.097 73.387,118.091 73.387,134.659 75.946,137.218 75.946,140.335 Ptop.16@74.676,141.605
TCONN4: Ptop.15 U1.PD2 | length 37.6
  Top Layer w0.2: U1.PD2@66.21,105.086 66.21,108.247 70.358,112.395 70.358,115.24 v1@70.104,115.494
  Signal Layer 1 w0.2: v1(69.949,115.665) 69.949,116.304 72.987,119.342 72.987,134.836 74.676,136.525 Ptop.15@74.676,139.065
TCONN5: Ptop.14 U1.PD3 | length 41.2
  Top Layer w0.2: U1.PD3@65.71,105.086 65.71,108.409 69.958,112.657 69.958,113.938 v1@69.596,114.3
  Signal Layer 1 w0.2: v1(69.331,114.326) 68.961,114.696 68.961,116.078 72.587,119.704 72.587,135.071 73.533,136.017 73.533,137.522 73.406,137.649 73.406,140.678 72.479,141.605 Ptop.14@72.136,141.605
TCONN6: Ptop.13 U1.PD4 | length 36.7
  Top Layer w0.2: U1.PD4@65.21,105.086 65.21,108.517 68.453,111.76 68.453,114.681 v1@68.326,114.808
  Signal Layer 1 w0.2: v1(68.152,115.139) 68.152,116.085 72.136,120.069 Ptop.13@72.136,139.065
TCONN7: Ptop.12 U1.PD5 | length 41.3
  Top Layer w0.2: U1.PD5@64.71,105.086 64.71,108.826 67.965,112.081 67.965,113.545 66.802,114.708 v1@66.802,115.062
  Signal Layer 1 w0.2: v1(66.847,115.393) 66.847,115.849 71.736,120.738 71.736,137.306 70.866,138.176 70.866,140.97 70.231,141.605 Ptop.12@69.596,141.605
TCONN8: Ptop.11 U1.PG12 | length 40.7
  Top Layer w0.2: U1.PG12@60.71,105.086 60.71,108.589 62.103,109.982 62.103,112.522 61.722,112.903 61.722,113.939 v1@62.819,115.036
  Signal Layer 1 w0.2: v1(62.982,115.178) 65.571,115.178 70.154,119.761 70.193,119.761 71.336,120.904 71.336,135.928 69.596,137.668 Ptop.11@69.596,139.065
TCONN9: Ptop.10 U1.PG13 | length 44.7
  Top Layer w0.2: U1.PG13@60.21,105.086 60.21,108.655 61.595,110.04 61.595,111.887 v1@61.341,112.141
  Signal Layer 1 w0.2: v1(61.168,112.231) 61.722,112.785 61.722,115.062 62.611,115.951 63.683,115.951 63.747,115.887 65.715,115.887 70.936,121.108 70.936,135.362 68.326,137.972 68.326,140.335 Ptop.10@67.056,141.605
TCONN10: Ptop.9 U1.PG14 | length 42
  Top Layer w0.2: U1.PG14@59.71,105.086 59.71,108.732 60.833,109.855 v1@60.833,110.49
  Signal Layer 1 w0.2: v1(60.787,110.707) 60.198,111.296 60.198,112.822 61.322,113.946 61.322,115.322 62.459,116.459 63.741,116.459 63.913,116.287 65.38,116.287 70.358,121.265 70.358,134.874 67.056,138.176 Ptop.9@67.056,139.065
TCONN11: Ptop.8 U1.PG15 | length 46.1
  Top Layer w0.2: U1.PG15@58.21,105.086 58.21,106.216 59.31,107.316 59.31,109.475 59.71,109.875 v1@59.71,110.109
  Signal Layer 1 w0.2: v1(59.644,110.092) 59.644,112.947 60.922,114.225 60.922,115.532 62.249,116.859 63.906,116.859 64.078,116.687 65.214,116.687 69.85,121.323 69.85,134.747 67.564,137.033 66.735,137.033 65.786,137.982 65.786,140.462 64.643,141.605 Ptop.8@64.516,141.605
TCONN12: Ptop.7 U1.PB4 | length 38
  Top Layer w0.2: U1.PB4@57.21,105.086 57.21,106.417 58.039,107.246 58.039,110.161 57.67,110.53 57.67,118.403 56.896,119.177 56.896,124.206 64.516,131.826 Ptop.7@64.516,139.065
TCONN13: Ptop.6 U1.PB5 | length 40.8
  Top Layer w0.2: U1.PB5@56.71,105.086 56.71,106.482 57.639,107.411 57.639,109.995 57.27,110.364 57.27,118.237 56.496,119.011 56.496,124.381 63.373,131.258 63.373,137.668 63.219,137.822 63.219,140.362 Ptop.6@61.976,141.605
TCONN14: Ptop.5 U1.PB8 | length 44.6
  Top Layer w0.2: v1@51.919,111.379 52.173,111.633 52.471,111.633 54.71,109.394 U1.PB8@54.71,105.086
  Signal Layer 1 w0.2: v1(51.803,111.252) 51.803,132.702 53.086,133.985 60.599,133.985 61.976,135.362 Ptop.5@61.976,139.065
TCONN15: Ptop.4 U1.PB9 | length 48.5
  Top Layer w0.2: v1@51.816,109.875 52.05,110.109 53.429,110.109 54.21,109.328 U1.PB9@54.21,105.086
  Signal Layer 1 w0.2: v1(51.849,109.732) 51.599,109.982 51.181,109.982 50.8,110.363 50.8,112.268 51.403,112.871 51.403,132.868 52.92,134.385 60.171,134.385 60.706,134.92 60.706,140.335 Ptop.4@59.436,141.605
TCONN16: Ptop.3 U1.PE0 | length 44.3
  Top Layer w0.2: v1@51.073,108.636 53.521,108.636 53.71,108.447 U1.PE0@53.71,105.086
  Signal Layer 1 w0.2: v1(50.833,108.68) 50.833,109.187 50.292,109.728 50.292,112.326 50.927,112.961 50.927,133.096 52.519,134.688 52.618,134.688 52.766,134.836 59.144,134.836 59.436,135.128 Ptop.3@59.436,139.065
TIM2_CH1: PipwmGen.1 U1.PA5 | length 47.7
  Top Layer w0.2: v1@53.34,67.183 53.114,67.409 53.114,79.838 54.21,80.934 U1.PA5@54.21,83.636
  Signal Layer 1 w0.2: PipwmGen.1@23.749,68.453 26.612,68.453 26.758,68.307 36.766,68.307 36.9,68.441 37.522,68.441 37.656,68.307 45.251,68.307 45.397,68.453 52.258,68.453 v1(53.64,67.071)
TIM2_CH3: P5.5 U1.PB10 | length 67.1
  Top Layer w0.2: U1.PB10@68.21,83.636 68.21,73.649 v1@68.453,73.406
  Signal Layer 2 w0.2: v1(68.6,73.289) 69.507,72.382 69.507,43.073 70.377,42.203 70.377,40.894 70.631,40.64 86.868,40.64 87.884,39.624 87.884,35.941 89.154,34.671 P5.5@89.154,34.544
TIM3_CH1: P2.5 U1.PC6 | length 58.9
  Top Layer w0.2: U1.PC6@71.685,97.111 73.196,97.111 77.696,92.611 104.994,92.611 106.153,93.77 106.153,96.539 104.394,98.298 104.394,99.88 v1@106.622,102.108
  Signal Layer 1 w0.2: v1(106.776,102.18) 113.864,102.18 114.173,102.489 116.967,102.489 P2.5@118.237,103.759
TIM3_CH2: P1.5 U1.PC7 | length 73.7
  Top Layer w0.2: U1.PC7@71.685,97.611 73.181,97.611 73.196,97.596 73.211,97.611 73.458,97.611 78.058,93.011 102.028,93.011 103.994,94.977 103.994,100.946 109.855,106.807 v1@109.855,120.523
  Signal Layer 1 w0.2: v1(109.901,120.792) 114.331,125.222 117.043,125.222 P1.5@118.237,126.416
TIM4_CH1: P4.5 U1.PD12 | length 76.9
  Top Layer w0.2: U1.PD12@71.685,89.611 73.457,89.611 76.073,86.995 76.073,84.328 76.447,83.954 76.955,83.954 78.41,82.499 88.468,82.499 v1@88.773,82.804
  Signal Layer 2 w0.2: v1(88.793,83.052) 88.793,67.925 90.678,66.04 90.678,63.627 90.209,63.158 90.209,57.55 90.482,57.277 116.967,57.277 P4.5@118.237,58.547
TIM4_CH2: P3.5 U1.PD13 | length 52.7
  Top Layer w0.2: U1.PD13@71.685,90.111 73.523,90.111 76.474,87.16 76.474,85.077 78.62,82.931 87.242,82.931 88.258,83.947 89.027,83.947 90.475,82.499 108.153,82.499 v1@108.458,82.804
  Signal Layer 1 w0.2: v1(108.554,83.052) 113.163,83.052 113.919,82.296 117.094,82.296 118.237,81.153 P3.5@118.237,81.026
TIM5_CH1: PipwmGen.2 U1.PA0 | length 43.9
  Top Layer w0.2: v1(45.251,84.201) 46.013,84.963 46.482,84.963 48.13,86.611 U1.PA0@50.235,86.611
  Signal Layer 1 w0.2: PipwmGen.2@23.749,70.993 24.638,70.993 26.924,68.707 36.601,68.707 36.735,68.841 37.687,68.841 37.821,68.707 45.085,68.707 45.251,68.873 v1(45.251,84.201)
VBAT: C21.2 R9.1 U1.VBAT | length 19.7
  Top Layer w0.2: R9.1@44.729,109.982 44.475,109.728 C21.2@42.469,109.728 42.469,108.636 41.668,107.835 41.668,102.378 42.545,101.501 42.545,100.838 42.772,100.611 U1.VBAT@50.235,100.611
VCAP: C8.2 C9.2 U1.VCAP | length 55.3
  Top Layer w0.2: U1.VCAP@69.21,83.636 69.21,78.491 70.485,77.216 v1@70.485,76.962 ; U1.VCAP@71.685,102.111 74.927,102.111 77.597,99.441 79.84,99.441 v1@80.01,99.611 ; C9.2@78.791,77.724 79.177,77.724 79.903,76.998 ; v1(79.903,76.21) 79.903,76.998 ; C8.2@80.772,78.054 79.903,77.185 79.903,76.998
  Signal Layer 1 w0.2: v1(70.632,76.718) 74.158,76.718 74.676,76.2 v1@79.883,76.2 ; v1(79.903,76.21) 79.903,80.284 81.788,82.169 81.788,98.679 80.557,99.91 v1(79.995,99.91)
VCC: J1.6 P1.1 P1.8 P2.1 P2.8 P3.1 P3.8 P4.1 P4.8 P5.1 P5.8
VDDA: C7.2 C22.2 C25.2 R5.1 R8.2 U1.VDDA | length 30.7
  Top Layer w0.2: R5.1@35.103,78.928 36.068,78.928 ; C7.2@35.306,76.566 35.306,77.089 36.068,77.851 ; v1(36.031,80.43) 36.068,80.393 36.068,78.928 ; R8.2@37.033,78.928 36.068,78.928 ; C25.2@41.021,74.661 38.481,74.661 C22.2@38.354,74.788 38.354,75.616 36.119,77.851 36.068,77.851 ; v1(45.338,85.498) 45.338,86.359 46.09,87.111 U1.VDDA@50.235,87.111 ; 36.068,77.851 36.068,78.928
  Signal Layer 1 w0.2: v1@35.941,80.391 39.37,80.391 44.704,85.725 45.085,85.725 45.098,85.738 v1(45.338,85.498)
VREF+: R8.1 U1.VREF+ | length 17.1
  Top Layer w0.2: R8.1@38.913,78.928 38.913,81.153 v1(39.079,81.319) ; v1(44.323,86.741) 44.323,86.9 45.034,87.611 U1.VREF+@50.235,87.611
  Signal Layer 1 w0.2: v1@39.116,81.407 39.82,81.407 44.323,85.91 v1(44.323,86.741) v1@44.323,87.094
VREFP: C23.2 C24.2 Pvrefp.1 Pvrefp.2 | length 13.3
  Top Layer w0.2: C23.2@46.99,72.949 46.279,72.949 45.339,72.009 45.339,67.818 Pvrefp.2@46.736,66.421 Pvrefp.1@49.276,66.421
  Top Layer w0.254: C23.2@46.99,72.832 C24.2@49.454,72.832 ; C24.2@49.581,72.949 C24.2@49.657,72.873
WiFi_Interrupt: Pwifi.2 U1.PD6 | length 50.1
  Top Layer w0.2: U1.PD6@63.21,105.086 63.21,107.914 67.437,112.141 v1@67.437,112.657
  Signal Layer 1 w0.2: v1(67.172,112.822) 78.982,112.822 81.495,115.335 84.836,115.335 92.202,122.701 Pwifi.2@92.202,134.366
pads on no net: J1.None P1.6 P1.7 P2.6 P2.7 P3.6 P3.7 P4.6 P4.7 P5.6 P5.7 Pbot.3 Pjtag.1 Pjtag.2 Pjtag.9 Pjtag.13 Pjtag.14 Pleft.1 Ptop.1 Pusb.2 Pusb.3 Pusb.4 S1.3 S1.4 S1.5 U3.1 U3.10 U3.11 U3.12

## Polygon pours and split planes (outlines as drawn)
GND on Bottom Layer "Bottom Layer-GND 5" (solid, pour order 22): 80.899,62.102 80.899,110.409 77.47,113.838 30.353,113.838 28.829,112.314 28.829,63.375
GND on Bottom Layer "Bottom Layer-GND 6" (solid, pour order 20): 30.533,65.151 78.74,65.151 80.899,62.992 80.899,51.308 76.962,47.371 30.228,47.371
GND on Bottom Layer "Bottom Layer-GND 2" (solid, pour order 18): 17.272,66.548 17.272,43.307 19.177,41.402 32.042,41.402 34.163,43.523 34.163,64.428 32.024,66.567 17.145,66.567
GND on Bottom Layer "Bottom Layer-GND 3" (solid, pour order 16): 16.256,90.17 16.256,66.802 16.764,66.294 32.004,66.294 32.639,66.929 32.639,90.805 15.875,90.805
GND on Bottom Layer "Bottom Layer-GND 4" (solid, pour order 14): 13.462,114.808 13.462,90.17 14.097,89.535 32.004,89.535 33.401,90.932 33.401,112.522 31.115,114.808
GND on Bottom Layer "Bottom Layer-GND" (solid, pour order 12): 30.988,133.604 30.988,141.224 30.226,141.986 11.459,141.986 9.779,140.306 9.906,140.179 9.906,116.078 11.557,114.427 16.002,114.427 16.002,114.554 18.669,117.221 18.669,133.604
GND on Bottom Layer "Bottom Layer-GND 1" (solid, pour order 10): 94.722,117.856 93.218,119.36 93.218,131.242 93.726,131.75 93.726,135.509 92.837,136.398 81.534,136.398 80.518,137.414 80.518,141.605 81.153,142.24 81.28,142.113 93.091,142.113 95.25,139.954 95.25,137.668 96.012,137.668 96.266,137.414 112.014,137.414 113.284,136.144 113.284,120.269 113.792,119.761 119.114,119.761 119.241,119.634 119.241,117.856
VCC on Bottom Layer "Bottom Layer-VCC" (solid, pour order 8): 97.155,46.736 81.534,46.736 80.264,45.466 80.264,33.655 79.756,33.147 79.629,33.274 77.978,33.274 77.343,33.909 77.343,45.593 80.772,49.022 97.155,49.022
VCC on Bottom Layer "Bottom Layer-VCC 1" (solid, pour order 6): 95.377,72.39 95.377,48.514 97.155,46.736 119.082,46.736 119.082,46.819 119.634,47.371 119.38,47.625 119.38,49.403 119.126,49.657 99.822,49.657 99.06,50.419 99.06,72.39
VCC on Bottom Layer "Bottom Layer-VCC 2" (solid, pour order 4): 95.393,93.472 95.393,70.787 96.075,70.104 96.075,70.04 97.155,68.961 119.316,68.961 119.316,69.025 119.634,69.342 119.507,69.469 119.507,71.711 119.082,72.136 99.831,72.136 99.06,72.907 99.06,93.472
VCC on Bottom Layer "Bottom Layer-VCC 3" (solid, pour order 2): 95.377,115.062 95.377,92.583 96.012,91.948 96.139,92.075 119.126,92.075 119.507,92.456 119.507,94.488 119.253,94.742 99.714,94.742 98.679,95.777 98.679,115.128 95.25,115.128
VCC on Bottom Layer "Bottom Layer-VCC 4" (solid, pour order 0): 39.079,133.26 39.243,133.096 57.023,133.096 75.057,115.062 119.253,115.062 119.253,115.139 119.507,115.393 119.507,117.348 119.253,117.602 114.554,117.602 114.046,117.094 113.411,117.729 76.073,117.729 56.388,137.414 45.085,137.414 43.815,138.684 39.079,138.684
GND on Signal Layer 2 "Signal Layer 2-GND" (solid, pour order 24): 104.521,89.281 101.981,86.741 74.549,86.741 73.406,87.884 73.406,102.997 77.978,107.569 86.614,107.569 93.345,114.3 104.521,114.3

## Silkscreen, mask and mechanical layers (free items; w line width, h text height)
Top Overlay:
  lines w0.254: 119.634,45.339 119.507,45.212 105.837,45.212 105.837,135.047 106.553,135.763 119.634,135.763 119.634,45.593
  text "IMU" at 61.976,122.301 h1
  text "SCL" at 12.7,94.869 h1
  text "SDA" at 12.446,92.456 h1
  text "MOTORS" at 109.346,84.074 h3 r90
  text "Dribbler" at 76.073,41.632 h3

## Text inside footprints (layer, text, board x,y; h text height)
P1: Top Overlay "14" at 116.205,133.528 h1.27 r90; Top Overlay "7" at 118.745,133.528 h1.27 r90; Top Overlay "1" at 118.745,113.716 h1.27 r90; Top Overlay "8" at 116.205,113.716 h1.27 r90
P2: Top Overlay "14" at 116.205,110.871 h1.27 r90; Top Overlay "7" at 118.745,110.871 h1.27 r90; Top Overlay "1" at 118.745,91.059 h1.27 r90; Top Overlay "8" at 116.205,91.059 h1.27 r90
P3: Top Overlay "14" at 116.205,88.138 h1.27 r90; Top Overlay "7" at 118.745,88.138 h1.27 r90; Top Overlay "1" at 118.745,68.326 h1.27 r90; Top Overlay "8" at 116.205,68.326 h1.27 r90
P4: Top Overlay "14" at 116.205,65.659 h1.27 r90; Top Overlay "7" at 118.745,65.659 h1.27 r90; Top Overlay "1" at 118.745,45.847 h1.27 r90; Top Overlay "8" at 116.205,45.847 h1.27 r90
P5: Top Overlay "14" at 96.266,36.576 h1.27; Top Overlay "7" at 96.266,34.036 h1.27; Top Overlay "1" at 76.454,34.036 h1.27; Top Overlay "8" at 76.454,36.576 h1.27
Pjtag: Top Overlay "1" at 107.214,141.783 h1.97 r180; Top Overlay "2" at 107.214,140.157 h1.97 r180; Top Overlay "13" at 95.008,141.783 h1.97 r180; Top Overlay "14" at 95.008,140.157 h1.97 r180; Mechanical 40 "1.270" at 110.198,140.462 h0.39 r180; Mechanical 40 "3.429" at 112.039,140.462 h0.39 r180; Mechanical 40 "1.270" at 107.15,137.223 h0.39 r180; Mechanical 40 "8.890" at 101.371,145.161 h0.39 r180; Mechanical 40 "7.620" at 101.371,136.207 h0.39 r180; Mechanical 40 "1.143" at 95.529,139.827 h0.39 r180; Mechanical 40 "1.143" at 94.958,137.605 h0.39 r180; Mechanical 16 "1" at 107.214,141.783 h1.97 r180; Mechanical 16 "2" at 107.214,140.157 h1.97 r180; Mechanical 16 "13" at 95.008,141.783 h1.97 r180; Mechanical 16 "14" at 95.008,140.157 h1.97 r180
Pleft: Top Overlay "16" at 11.176,88.646 h1.27 r90; Top Overlay "15" at 13.716,88.646 h1.27 r90; Top Overlay "1" at 13.716,66.802 h1.27 r90; Top Overlay "2" at 11.176,66.802 h1.27 r90
Prmii: Top Overlay "13" at 43.307,33.782 h1.27; Top Overlay "14" at 43.307,36.322 h1.27; Top Overlay "1" at 22.987,33.782 h1.27; Top Overlay "2" at 22.987,36.322 h1.27
Ptop: Top Overlay "18" at 79.248,141.097 h1.27; Top Overlay "17" at 79.248,138.557 h1.27; Top Overlay "1" at 54.356,138.557 h1.27; Top Overlay "2" at 53.848,141.097 h1.27
Pusb: Mechanical 13 "PCB END" at 9.301,131.784 h1.88 r270; Mechanical 13 "PCB END" at 9.301,131.784 h1.88 r270